# EAGLE board TopBoards (EAGLE 7.6.0)
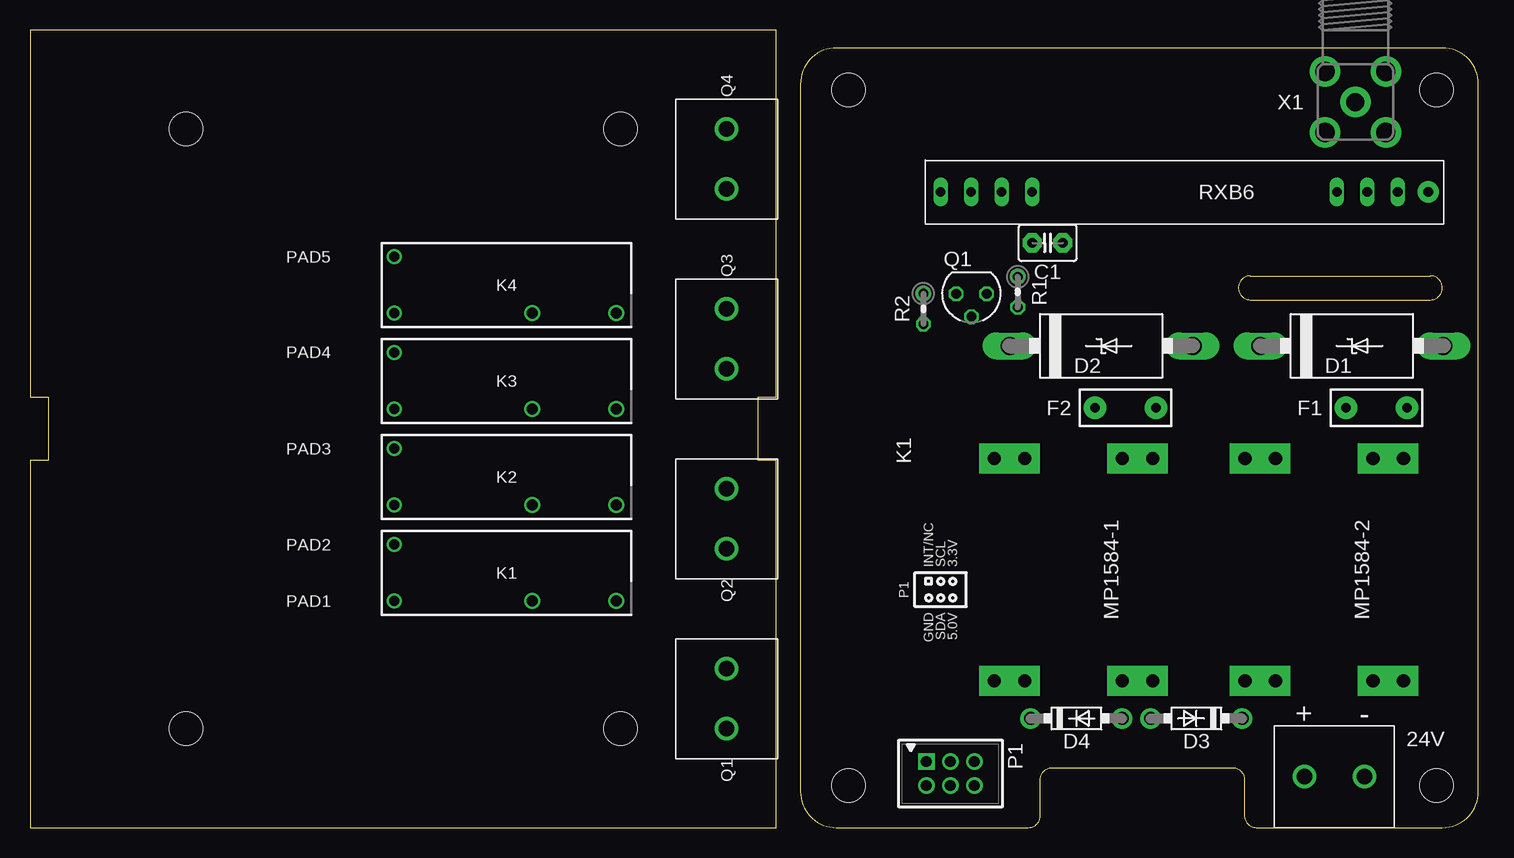
[diagram p0: board, top side]
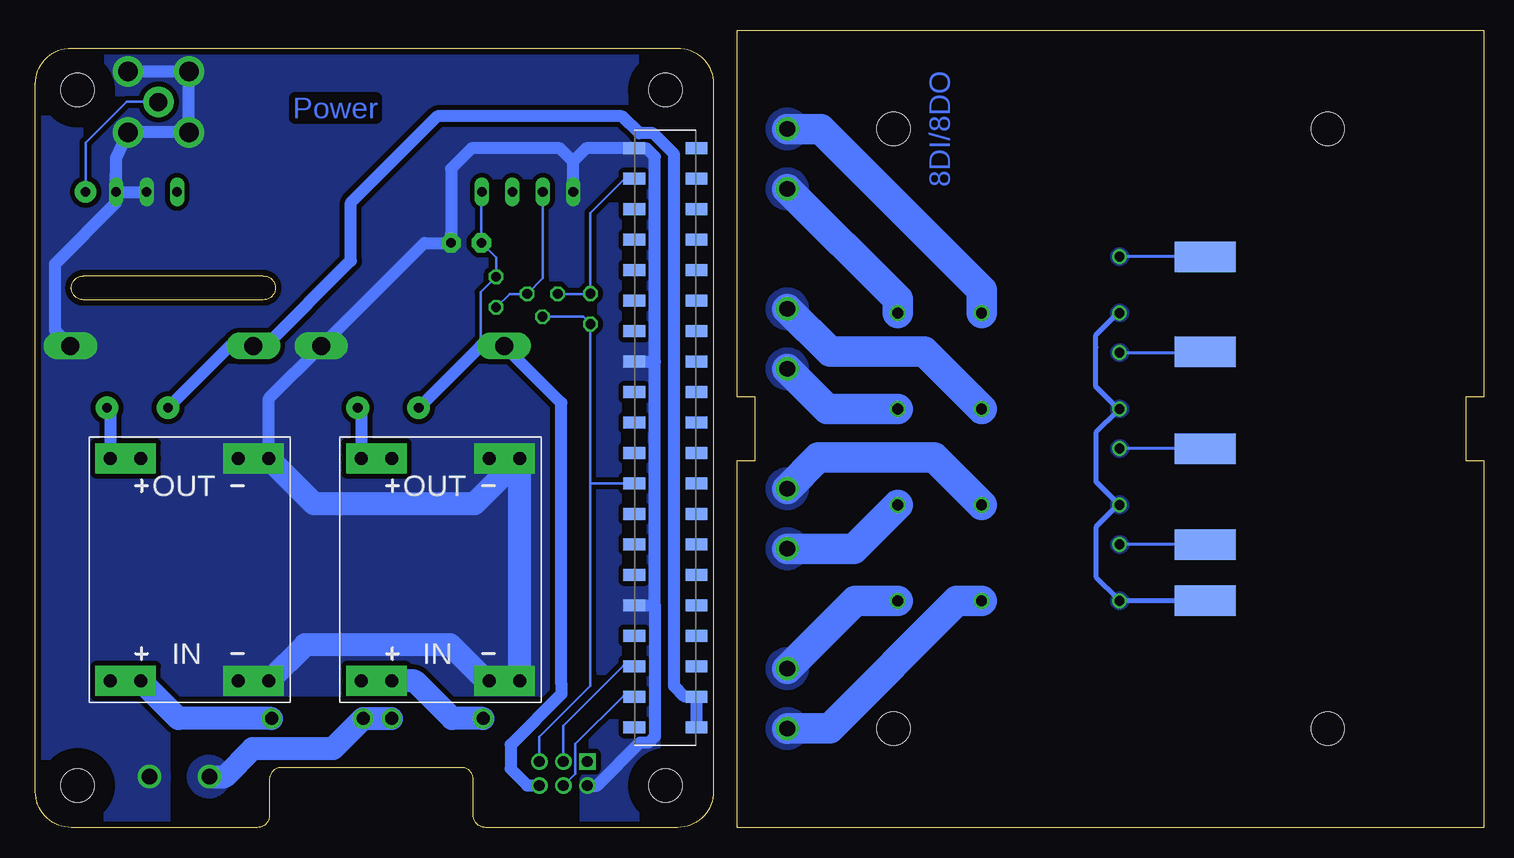
[diagram p1: board, bottom side, seen from below]

Size 120.7 x 66.5 mm. Coordinates in mm from the lower left corner, seen from the top.
Outline: 62.2,0 62.2,30.6 60.7,30.6 60.7,35.9 62.2,35.9 62.2,66.5 0,66.5 0,35.9 1.5,35.9 1.5,30.6 0,30.6 0,0 62.2,0
Outline: 120.7,3 120.7,62 arc90 117.7,65 67.2,65 arc90 64.2,62 64.2,3 arc90 67.2,0 83.2,0 arc90 84.2,1 84.2,4 arc-90 85.2,5 100.2,5 arc-90 101.2,4 101.2,1 arc90 102.2,0 117.7,0 arc90 120.7,3
Outline: 101.7,44 116.7,44 arc90 117.7,45 arc90 116.7,46 101.7,46 arc90 100.7,45 arc90 101.7,44
Copper layers (1*16): Top 0.035mm / dielectric 1.6mm / Bottom 0.035mm
Design rules "Elecrow": minimum track width 6mil, minimum drill 12mil, track to track 6mil, track to pad 6mil, pad to pad 6mil, via to via 8mil, smd to smd 0mil, copper to edge 20mil, drill to drill 10mil, minimum pad ring 6mil, minimum via ring 6mil, stop-mask expansion 0mil, vias tented up to drill 100mil, thermal gap 10mil
Holes 2.75 mm at 13,8.25 49.2,58.25 49.2,8.25 13,58.25 117.2,3.5 117.2,61.5 68.2,61.5 68.2,3.5
bRestrict: area 114.5,58.8 to 119.9,64.2; area 65.5,0.8 to 70.9,6.2; area 65.5,58.8 to 70.9,64.2; area 114.5,0.8 to 119.9,6.2

## Footprints (pad centres in the part's own frame; a part is rotated, then mirrored left to right if it is on the bottom)
691131710002 = drill 1.3: 1 -2.5,0; 2 2.5,0
C2.5-3 = drill 0.813 pad 1.6 octagon: 1 -1.27,0; 2 1.27,0
C4111-15 = drill 1.499 long: A 7.62,0; C -7.62,0
DO41-7.6 = drill 1.1 pad 1.7: A 3.81,0; C -3.81,0
PTC = drill 0.8 pad 1.88: P$1 -2.54,0; P$2 2.54,0
HF46 = drill 0.813: 1 -9.35,2.35; 2 -9.35,-2.35 | drill 0.889: COM 2.15,-2.35 | drill 0.9: NO 9.15,-2.35
61004021821 = smd 1 x 1.8: 1 -24.13,2.6; 2 -21.59,2.6; 3 -19.05,2.6; 4 -16.51,2.6; 5 -13.97,2.6; 6 -11.43,2.6; 7 -8.89,2.6; 8 -6.35,2.6; 9 -3.81,2.6; 10 -1.27,2.6; 11 1.27,2.6; 12 3.81,2.6; 13 6.35,2.6; 14 8.89,2.6; 15 11.43,2.6; 16 13.97,2.6; 17 16.51,2.6; 18 19.05,2.6; 19 21.59,2.6; 20 24.13,2.6; 21 24.13,-2.6; 22 21.59,-2.6; 23 19.05,-2.6; 24 16.51,-2.6; 25 13.97,-2.6; 26 11.43,-2.6; 27 8.89,-2.6; 28 6.35,-2.6; 29 3.81,-2.6; 30 1.27,-2.6; 31 -1.27,-2.6; 32 -3.81,-2.6; 33 -6.35,-2.6; 34 -8.89,-2.6; 35 -11.43,-2.6; 36 -13.97,-2.6; 37 -16.51,-2.6; 38 -19.05,-2.6; 39 -21.59,-2.6; 40 -24.13,-2.6
DC-DC-STEP-DOWN-MP1584 = drill 1.1 pad 2.5 square: IN+0 -9.271,4.064; IN+1 -9.271,6.604; IN-0 -9.271,-4.064; IN-1 -9.271,-6.604; OUT+0 9.271,4.064; OUT+1 9.271,6.604; OUT-0 9.271,-4.064; OUT-1 9.271,-6.604
DF11-06DP-2DSA = drill 0.914 square: 1 2,-1 | drill 0.914: 2 2,1; 3 0,-1; 4 0,1; 5 -2,-1; 6 -2,1
SMD2,54-5,08 = smd 2.54 x 5.08: 1 0,0
SOT54E = drill 0.813 octagon: D -1.27,0; G 0,1.905; S 1.27,0
0204V = drill 0.813 octagon: 1 -1.27,0; 2 1.27,0
WIRELESS-RXB6-5V = drill 0.8 pad 1.778: ANT -20.32,0 | drill 0.8 long: DATA 17.78,0; DE 15.24,0; GND@1 20.32,0; GND@2 -15.24,0; GND@3 -17.78,0; VDD@1 12.7,0; VDD@2 -12.7,0
SMA90_DIP = drill 1.5 pad 2.54: ANTENNA 0,0 | drill 1.6 pad 2.54: GND1 -2.54,2.54; GND2 2.54,2.54; GND3 -2.54,-2.54; GND4 2.54,-2.54

## Placement (x,y rotation side)
24V  691131710002  [691131710002]  108.7,4.25 180 top
C1  100nF  [C2.5-3]  84.8,48.75 180 top
D1  1N5908  [C4111-15]  110.16,40.16 0 top
D2  1N5908  [C4111-15]  89.26,40.16 0 top
D3  SB160  [DO41-7.6]  97.2,9.1 180 top
D4  SB160  [DO41-7.6]  87.2,9.1 0 top
F1  PTCPTH  [PTC]  112.2,35 0 top
F2  PTCPTH  [PTC]  91.3,35 180 top
K1  HF46105  [HF46]  39.7,21.25 0 top
K2  HF46105  [HF46]  39.7,29.25 0 top
K3  HF46105  [HF46]  39.7,37.25 0 top
K4  HF46105  [HF46]  39.7,45.25 0 top
K11  61004021821  [61004021821]  68.2,32.5 90 bottom
MP1584-1  DC-DC-STEP-DOWN-MP1584  [DC-DC-STEP-DOWN-MP1584]  86.95,21.5 90 bottom
MP1584-2  DC-DC-STEP-DOWN-MP1584  [DC-DC-STEP-DOWN-MP1584]  107.85,21.5 90 bottom
P1  DF11-06-2DSA  [DF11-06DP-2DSA]  76.7,4.5 180 top
PAD1  +5V  [SMD2,54-5,08]  23.2,18.9 270 bottom
PAD2  [SMD2,54-5,08]  23.2,23.6 270 bottom
PAD3  [SMD2,54-5,08]  23.2,31.6 270 bottom
PAD4  [SMD2,54-5,08]  23.2,39.65 270 bottom
PAD5  [SMD2,54-5,08]  23.2,47.6 270 bottom
Q1  691131710002  [691131710002]  58.05,10.75 270 top
Q2  691131710002  [691131710002]  58.05,25.75 90 top
Q3  691131710002  [691131710002]  58.05,40.75 90 top
Q4  691131710002  [691131710002]  58.05,55.75 90 top
Q11  BS170  [SOT54E]  78.45,44.5 180 top
R1  10K  [0204V]  82.31,44.65 270 top
R2  10K  [0204V]  74.45,43.25 270 top
RXB6  WIRELESS-RXB6-5V  [WIRELESS-RXB6-5V]  96.2,53 180 top
X1  [SMA90_DIP]  110.45,60.5 0 top

## Library data of the parts
24V Q1-Q4 = con-wuerth
C1 = capacitor-wima
D1-D4 = diode
F1 F2 = SparkFun-PowerIC
K1-K4 = hongfa; OC_FARNELL: unknown; OC_NEWARK: unknown
K11 = Board_to_Board_Connectors_rev15d; NAME1: K1
MP1584-1 MP1584-2 RXB6 = diy-modules
P1 = con-hirose-df11
PAD1-PAD5 = wirepad
Q11 = transistor-small-signal; MF: ON SEMICONDUCTOR; MPN: BS170G; NAME1: Q1; OC_FARNELL: 9556192
R1 R2 = rcl; OC_FARNELL: unknown
X1 = adafruit

## Nets
+24V: 24V.2 D3.A D4.A
GND: 24V.1 C1.1 D1.A D2.A K11.5 K11.13 K11.20 MP1584-1.IN-0 MP1584-1.IN-1 MP1584-1.OUT-0 MP1584-1.OUT-1 MP1584-2.IN-0 MP1584-2.IN-1 MP1584-2.OUT-0 MP1584-2.OUT-1 P1.2 RXB6.GND@1 RXB6.GND@2 RXB6.GND@3 X1.GND1 X1.GND2 X1.GND3 X1.GND4
N$1: K1.2 K2.2 K3.2 K4.2 PAD1.1
N$2: K2.1 PAD3.1
N$3: Q11.D R1.2 RXB6.DATA
N$4: K4.1 PAD5.1
N$5: K1.1 PAD2.1
N$6: K1.NO Q1.1
N$7: K1.COM Q1.2
N$8: K2.NO Q2.1
N$9: K2.COM Q2.2
N$10: K3.NO Q3.1
N$11: K3.COM Q3.2
N$12: K4.NO Q4.1
N$13: K4.COM Q4.2
N$14: K3.1 PAD4.1
N$15: K11.3 P1.3
N$21: C1.2 D2.C F2.P$2 P1.6 R1.1 RXB6.VDD@1 RXB6.VDD@2
N$41: F1.P$2 MP1584-2.OUT+0 MP1584-2.OUT+1
N$51: D1.C F1.P$1 K11.39 K11.40
N$61: F2.P$1 MP1584-1.OUT+0 MP1584-1.OUT+1
N$69: K11.19 Q11.S R2.1
N$71: D3.C MP1584-2.IN+0 MP1584-2.IN+1
N$81: RXB6.ANT X1.ANTENNA
N$91: D4.C MP1584-1.IN+0 MP1584-1.IN+1
N$111: K11.9 P1.5 Q11.G R2.2
N$121: K11.2 P1.4

## Tracks (layer width: path | path; a pad name or v marks a point on that pad's centre or on a via)
+24V
  Bottom 1.93: 24V.2 104.93,4.25 102.59,6.59 95.9,6.59 D3.A D4.A
  pour Bottom (isolate 0.254, no thermals): 107.5,3.15 arc180 105,5.35 arc180
GND
  Bottom 1.016: 69.07,18.53 69.07,38.84 | 69.07,38.84 69.07,55.92 69.76,56.61 70.78,56.61 K11.20 74.8,56.63 75.88,55.55 RXB6.GND@1 75.88,55.52 76.99,56.63 84.35,56.63 86.06,54.92 86.06,49.51 C1.1 88.29,48.75 D2.A 101.25,35.79 MP1584-2.OUT-1 | K11.5 69.07,18.53 | K11.13 70.77,38.84 69.07,38.84 | RXB6.GND@2 RXB6.GND@3 113.99,54.57 | X1.GND2 X1.GND1 X1.GND3 X1.GND4 114,55.83 113.99,54.57 | 69.07,18.53 69.07,7.6 69.59,7.08 70.32,7.08 73.9,3.5 P1.2 | D1.A 119.06,41.44 119.06,47 113.99,52.07 113.99,54.57
  Bottom 1.93: 103.84,12.17 MP1584-2.IN-0 | MP1584-1.IN-0 83.13,12.23 86.15,15.25 98.22,15.25 MP1584-2.IN-1 | MP1584-2.OUT-1 97.47,27 86.22,27 84.12,27 MP1584-1.OUT-1 MP1584-1.IN-1
  Bottom 2.54: MP1584-2.OUT-0 MP1584-2.OUT-1 | MP1584-1.OUT-0 81.57,30.77 MP1584-1.OUT-1 | MP1584-1.IN-1 MP1584-1.IN-0 | MP1584-2.IN-0 MP1584-2.IN-1
  pour Bottom (isolate 0.406, no thermals): 120.7,11.45 69.07,11.45 69.07,65 120.7,65
  pour Bottom (isolate 0.406, no thermals): 69.07,38.85 74.89,38.85 74.89,0 69.07,0
  pour Bottom (no thermals): 112.4,3.15 arc180 110,5.35 arc180
  pour Bottom (isolate 0.406, no thermals): 109.91,20 120.7,20 120.7,0 109.91,0
N$1
  Bottom 0.254: 30.27,18.9 K1.2 30.51,19.1 | 23.37,18.9 PAD1.1 | 30.5,27.02 K2.2 30.5,26.88 | 30.5,34.75 K3.2 30.5,34.95 | 30.5,42.88 K4.2
  Bottom 0.406: 23.37,18.9 30.27,18.9 | 30.5,27.02 32.32,28.84 32.32,31.09 32.32,32.93 30.5,34.75 | 30.5,42.88 32.32,41.06 32.32,40.03 32.32,36.77 30.5,34.95 | 30.51,19.1 32.32,20.91 32.32,23.07 32.32,25.06 30.5,26.88
  pour Bottom (no thermals): 29.88,43.38 arc180 30.82,42.42 arc180
  pour Bottom (no thermals): 30.82,35.38 arc180 29.88,34.42 arc180
  pour Bottom (no thermals): 30.82,27.39 arc180 29.88,26.41 arc180
  pour Bottom (no thermals): 30.82,19.38 arc180 29.88,18.42 arc180
N$2
  Bottom 0.254: K2.1 30.27,31.59 23.37,31.59 PAD3.1
  pour Bottom (no thermals): 30.82,32.08 arc180 29.88,31.12 arc180
N$3
  Bottom 0.203: RXB6.DATA 78.42,45.8 Q11.D 81.19,44.5 R1.2
N$4
  Bottom 0.254: K4.1 30.27,47.6 23.37,47.6 PAD5.1
  pour Bottom (no thermals): 29.88,48.08 arc180 30.82,47.12 arc180
N$5
  Bottom 0.254: K1.1 30.23,23.6 23.32,23.6 PAD2.1
  pour Bottom (no thermals): 30.82,24.08 arc180 29.88,23.12 arc180
N$6
  Bottom 2.54: K1.NO 52.4,18.9 Q1.1
  pour Bottom (no thermals): 56.85,14.35 arc180 59.25,12.15 arc180
N$7
  Bottom 2.54: K1.COM 43.9,18.9 54.53,8.28 58.02,8.28 Q1.2
  pour Bottom (no thermals): 56.85,9.35 arc180 59.25,7.15 arc180
N$8
  Bottom 2.54: K2.NO 52.5,23.25 Q2.1
  pour Bottom (no thermals): 56.85,24.35 arc180 59.25,22.15 arc180
N$9
  Bottom 2.54: K2.COM 45.79,30.84 55.46,30.84 Q2.2
  pour Bottom (no thermals): 56.85,29.35 arc180 59.25,27.15 arc180
N$10
  Bottom 2.54: K3.NO 54.7,34.9 Q3.1
  pour Bottom (no thermals): 56.85,39.35 arc180 59.25,37.15 arc180
N$11
  Bottom 2.54: K3.COM 46.62,39.67 54.48,39.67 Q3.2
  pour Bottom (no thermals): 56.85,44.35 arc180 59.25,42.15 arc180
N$12
  Bottom 2.54: K4.NO 48.85,44.05 Q4.1
  pour Bottom (no thermals): 56.85,54.35 arc180 59.25,52.15 arc180
N$13
  Bottom 2.54: K4.COM 41.85,44.81 55.27,58.23 58.03,58.23 Q4.2
  pour Bottom (no thermals): 56.85,59.35 arc180 59.25,57.15 arc180
N$14
  Bottom 0.254: K3.1 30.35,39.62 24.03,39.62 24.03,39.65 PAD4.1
  pour Bottom (no thermals): 30.82,40.08 arc180 29.88,39.12 arc180
N$15
  Bottom 0.203: P1.3 76.7,8.48 71.71,13.47 70.82,13.47 K11.3
N$21
  Bottom 0.203: 83.6,40.16 83.6,44.63 R1.1 82.31,47.53 C1.2 83.53,52.97 RXB6.VDD@1
  Bottom 1.016: F2.P$2 83.6,40.16 D2.C 76.88,35.4 76.88,11.95 76.88,11.13 81.11,6.9 81.11,4.91 79.72,3.52 78.72,3.52 P1.6
N$41
  Bottom 1.016: F1.P$2 114.45,34.71 MP1584-2.OUT+1
  Bottom 2.54: MP1584-2.OUT+1 MP1584-2.OUT+0
N$51
  Bottom 1.016: K11.40 K11.39 66.58,10.91 67.48,11.81 67.48,56.13 69.23,57.88 70.4,57.88 71.82,59.3 87.2,59.3 94.41,52.09 94.41,47.26 101.51,40.16 D1.C 104.5,40.16 F1.P$1
N$61
  Bottom 1.016: F2.P$1 93.55,34.71 MP1584-1.OUT+1
  Bottom 2.54: MP1584-1.OUT+1 MP1584-1.OUT+0
N$69
  Bottom 0.203: K11.19 71.61,54.09 74.45,51.25 R2.1 74.47,44.5 Q11.S
N$71
  Bottom 1.016: 114.46,12.22 MP1584-2.IN+1
  Bottom 1.93: D3.C 108.78,9.1 MP1584-2.IN+0
  Bottom 2.54: MP1584-2.IN+1 MP1584-2.IN+0
N$81
  Bottom 0.203: RXB6.ANT 116.52,57.11 113.11,60.52 110.47,60.52 X1.ANTENNA
N$91
  Bottom 1.016: 93.56,12.22 MP1584-1.IN+1
  Bottom 1.93: D4.C 85.97,9.1 89.09,12.22 MP1584-1.IN+0
  Bottom 2.54: MP1584-1.IN+0 MP1584-1.IN+1
N$111
  Bottom 0.203: 78.47,42.58 Q11.G 75.06,42.59 R2.2 74.45,28.67 | K11.9 70.91,28.8 70.91,28.67 74.45,28.67 | 74.45,28.67 74.45,12.85 74.45,11.83 78.7,7.58 P1.5
N$121
  Bottom 0.203: P1.4 75.7,4.5 75.7,6.96 71.73,10.93 70.82,10.93 K11.2

## Text on the board
Bottom: Power | 8DI/8DO
tNames: INT/NC | SCL | 3.3V | P1 | GND | SDA | 5.0V | + | -